# EAGLE board Arm-IMU (EAGLE 7.2.0)
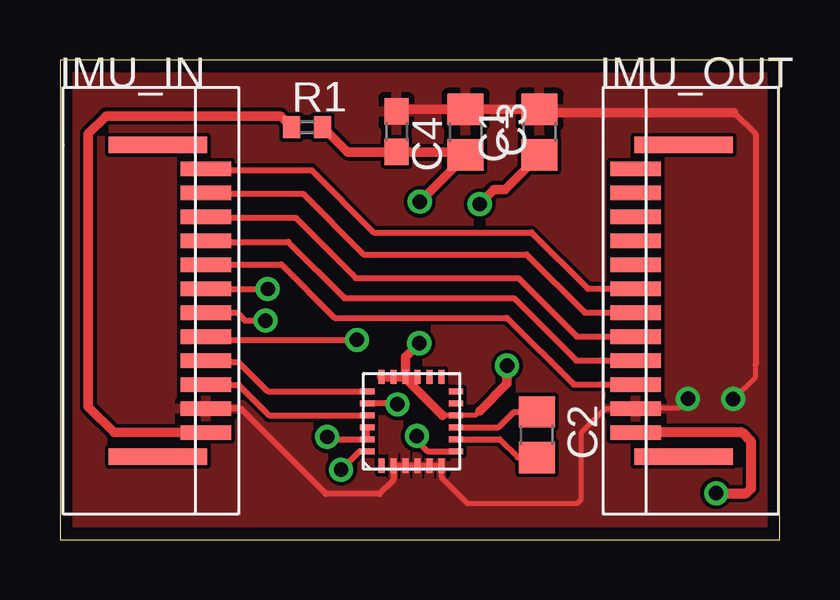
[diagram p0: board, top side]
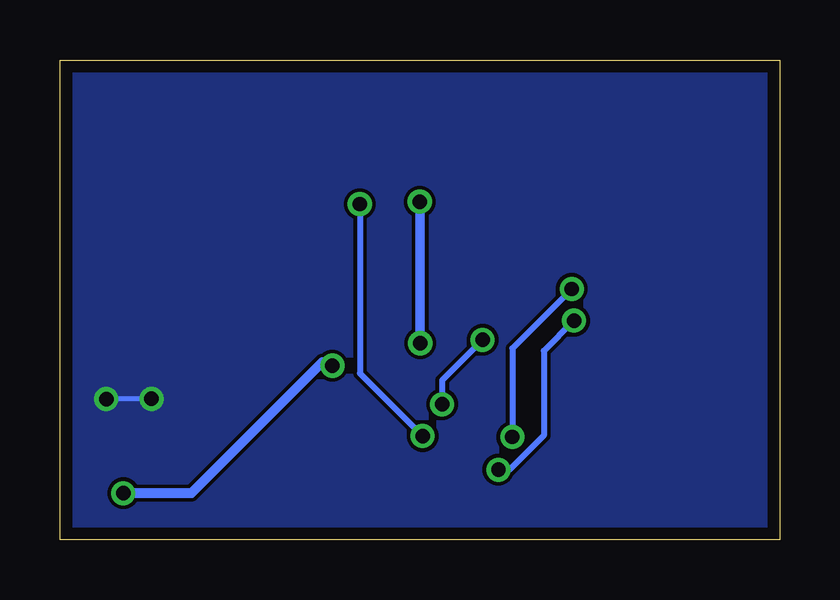
[diagram p1: board, bottom side, seen from below]

Size 30 x 20 mm. Coordinates in mm from the lower left corner, seen from the top.
Outline: 0,0 30,0 30,20 0,20 0,0
Copper layers (1*16): Top 0.035mm / dielectric 1.5mm / Bottom 0.035mm
Design rules "default *": minimum track width 6mil, minimum drill 12mil, track to track 6mil, track to pad 6mil, pad to pad 6mil, via to via 6mil, smd to smd 6mil, copper to edge 20mil, drill to drill 12mil, minimum pad ring 10mil, minimum via ring 8mil, stop-mask expansion 4mil, vias tented up to drill 0mil, thermal gap 10mil

## Footprints (pad centres in the part's own frame; a part is rotated, then mirrored left to right if it is on the bottom)
C0805 = smd 1.3 x 1.5: 1 -0.95,0; 2 0.95,0
C0603 = smd 1.1 x 1: 1 -0.85,0; 2 0.85,0
IN = smd 2.1 x 0.6: 1_VCC 2.3,-5.5; 2_GND 2.3,-4.5; 3_SCL 2.3,-3.5; 4_CS_G 2.3,-2.5; 5_CS_XM 2.3,-1.5; 6_SDI 2.3,-0.5; 7_SDO 2.3,0.5; 8_SCL_NEXT 2.3,1.5; 9_CS_G_NEXT 2.3,2.5; 10_CS_XM_NEXT 2.3,3.5; 11_SDI_NEXT 2.3,4.5; 12_SDO_NEXT 2.3,5.5 | smd 4.1 x 0.7: 13_NC 0.3,6.5; 14_NC 0.3,-6.5
OUT = smd 2.1 x 0.6: 1_VCC -2.3,-5.5; 2_GND -2.3,-4.5; 3_SCL -2.3,-3.5; 4_CS_G -2.3,-2.5; 5_CS_XM -2.3,-1.5; 6_SDI -2.3,-0.5; 7_SDO -2.3,0.5; 8_SCL_NEXT -2.3,1.5; 9_CS_G_NEXT -2.3,2.5; 10_CS_XM_NEXT -2.3,3.5; 11_SDI_NEXT -2.3,4.5; 12_SDO_NEXT -2.3,5.5 | smd 4.1 x 0.7: 13_NC -0.3,6.5; 14_NC -0.3,-6.5
R0402 = smd 0.7 x 0.9: 1 -0.65,0; 2 0.65,0
LGA-24 = smd 0.25 x 0.6: 1_RES -1.25,-1.85; 2_RES -0.75,-1.85; 3_RES -0.25,-1.85; 4_RES 0.25,-1.85; 5_GND 0.75,-1.85; 6_GND 1.25,-1.85; 13_INT1_XM 1.25,1.85; 14_INT2_XM 0.75,1.85; 15_VDD 0.25,1.85; 16_VDD -0.25,1.85; 17_VDD -0.75,1.85; 18_VDD_IO -1.25,1.85 | smd 0.6 x 0.25: 7_C1_XM 1.85,-1.25; 8_SETC_XM 1.85,-0.75; 9_SETP_XM 1.85,-0.25; 10_DEN_G 1.85,0.25; 11_INT_G 1.85,0.75; 12_DRDY_G 1.85,1.25; 19_CS_G -1.85,1.25; 20_CS_XM -1.85,0.75; 21_SCL/SPC -1.85,0.25; 22_SDO_G/SA0_G -1.85,-0.25; 23_SDO_XM/SA0_XM -1.85,-0.75; 24_SDA -1.85,-1.25

## Placement (x,y rotation side)
C1  4.7u  [C0805]  19.99,16.99 90 top
C2  0.22u  [C0805]  19.88,4.37 270 top
C3  10u  [C0805]  16.91,16.99 270 top
C4  100n  [C0603]  14.03,17.01 270 top
IMU_IN  IMU-BUCHSE-IN  [IN]  3.79,9.96 0 top
IMU_OUT  IMU-BUCHSE-OUT  [OUT]  26.3,9.96 0 top
R1  0  [R0402]  10.3,17.2 0 top
U$1  LSM9DS0-LGA-24  [LGA-24]  14.66,4.93 0 top

## Library data of the parts
C1-C3 R1 = rclGlove
C4 = resistor
IMU_IN IMU_OUT = IMU-Buchse
U$1 = ST LSM9DS0TR

## Nets
CS_G: IMU_IN.4_CS_G U$1.19_CS_G
CS_G_NEXT: IMU_IN.9_CS_G_NEXT IMU_OUT.4_CS_G
CS_XM: IMU_IN.5_CS_XM U$1.20_CS_XM
CS_XM_NEXT: IMU_IN.10_CS_XM_NEXT IMU_OUT.5_CS_XM
GND: C1.2 C3.1 C4.1 IMU_IN.2_GND IMU_OUT.2_GND U$1.2_RES U$1.3_RES U$1.4_RES U$1.5_GND U$1.6_GND
N$1: C1.1 U$1.7_C1_XM
N$2: C2.1 U$1.9_SETP_XM
N$3: C2.2 U$1.8_SETC_XM
N$4: IMU_IN.1_VCC R1.1
SCL: IMU_IN.3_SCL U$1.21_SCL/SPC
SCL_NEXT: IMU_IN.8_SCL_NEXT IMU_OUT.3_SCL
SDI: IMU_IN.6_SDI U$1.24_SDA
SDI_NEXT: IMU_IN.11_SDI_NEXT IMU_OUT.6_SDI
SDO: IMU_IN.7_SDO U$1.22_SDO_G/SA0_G U$1.23_SDO_XM/SA0_XM
SDO_NEXT: IMU_IN.12_SDO_NEXT IMU_OUT.7_SDO
VCC: C3.2 C4.2 IMU_OUT.1_VCC R1.2 U$1.10_DEN_G U$1.15_VDD U$1.16_VDD U$1.17_VDD U$1.18_VDD_IO

## Tracks (layer width: path | path; a pad name or v marks a point on that pad's centre or on a via)
CS_G
  Top 0.25: IMU_IN.4_CS_G 6.14,7.41 7.43,7.41 8.66,6.18 U$1.19_CS_G
CS_G_NEXT
  Top 0.25: IMU_IN.9_CS_G_NEXT 6.14,12.41 9.52,12.41 11.86,10.07 18.92,10.07 21.53,7.46 IMU_OUT.4_CS_G
CS_XM  (via drill 0.6)
  Top 0.25: IMU_IN.5_CS_XM 6.22,8.33 v12.38,8.33 | v14.07,5.64 13.86,5.43 13.61,5.68 U$1.20_CS_XM
  Bottom 0.25: v12.38,8.33 14.07,6.64 v14.07,5.64
CS_XM_NEXT
  Top 0.25: IMU_IN.10_CS_XM_NEXT 6.13,13.42 9.82,13.42 12.34,10.9 19.11,10.9 21.55,8.46 IMU_OUT.5_CS_XM
GND  (via drill 0.6)
  Top 0.2: U$1.6_GND 15.91,2.59 17,1.5 21.56,1.5 21.72,1.66 21.72,4.44 22.72,5.44 23.98,5.44 IMU_OUT.2_GND 24.03,5.49 25.8,5.49 v26.18,5.87 | v28.07,5.86 29,6.79 29,7.3
  Top 0.25: 28.1,17.8 29,16.9 29,7.3 | U$1.6_GND U$1.5_GND U$1.4_RES U$1.3_RES U$1.2_RES 13.91,2.5 13.31,1.9 11.09,1.9 7.53,5.46 IMU_IN.2_GND
  Top 0.4: C4.1 14.11,17.94 C3.1 C1.2 20.13,17.8 28.1,17.8
  Bottom 0.2: v26.18,5.87 v26.19,5.86 v28.07,5.86
  pour Bottom: 0,20 30,20 30,0 0,0
  pour Top: 0,20 30,20 30,0 0,0
N$1  (via drill 0.6)
  Top 0.25: v14.88,4.32 14.88,4.12 15.32,3.68 U$1.7_C1_XM
  Top 0.4: C1.1 18.55,14.6 18.1,14.6 v17.5,14 v17.5,13.99
  Bottom 0.25: v17.5,13.99 v17.49,13.98 17.49,6.93 v14.88,4.32
N$2
  Top 0.25: U$1.9_SETP_XM 18.29,4.68 18.93,5.32 C2.1
N$3
  Top 0.25: U$1.8_SETC_XM 18.33,4.18 19.09,3.42 C2.2
N$4
  Top 0.4: R1.1 9.19,17.66 1.92,17.66 1.18,16.92 1.18,5.54 2.26,4.46 IMU_IN.1_VCC
SCL
  Top 0.25: IMU_IN.3_SCL 7.45,6.45 8.72,5.18 U$1.21_SCL/SPC
SCL_NEXT
  Top 0.25: IMU_IN.8_SCL_NEXT 9.23,11.47 11.45,9.25 18.63,9.25 21.42,6.46 IMU_OUT.3_SCL
SDI  (via drill 0.6)
  Top 0.25: IMU_IN.6_SDI 7.39,9.46 7.72,9.13 v8.57,9.13 | v11.72,2.91 12.49,3.68 U$1.24_SDA
  Bottom 0.25: v8.57,9.13 9.83,7.87 9.83,4.34 11.26,2.91 v11.72,2.91
SDI_NEXT
  Top 0.25: IMU_IN.11_SDI_NEXT 6.13,14.42 10.13,14.42 12.66,11.89 19.45,11.89 21.88,9.46 IMU_OUT.6_SDI
SDO  (via drill 0.6)
  Top 0.25: IMU_IN.7_SDO v8.66,10.45 | v11.14,4.28 11.24,4.18 U$1.23_SDO_XM/SA0_XM U$1.22_SDO_G/SA0_G
  Bottom 0.25: v8.66,10.45 11.14,7.97 v11.14,4.28
SDO_NEXT
  Top 0.25: 6.15,15.4 10.49,15.4 13.08,12.81 19.66,12.81 22.01,10.46 IMU_OUT.7_SDO
  Top 0.4: IMU_IN.12_SDO_NEXT 6.15,15.4
VCC  (via drill 0.6)
  Top 0.2: 17.5,5.37 17.5,5.36 17.33,5.19 U$1.10_DEN_G 15.94,5.18
  Top 0.25: U$1.16_VDD U$1.15_VDD
  Top 0.4: v14.98,8.19 14.41,7.62 U$1.16_VDD | U$1.16_VDD U$1.17_VDD U$1.18_VDD_IO | v15,14.09 16.91,16 C3.2 16.91,16.16 C4.2 11.99,16.16 R1.2 | 17.5,5.37 18.64,6.51 v18.64,7.25 | 15.94,5.18 14.41,6.71 U$1.16_VDD
  Top 0.406: 18.64,6.75 v18.64,7.25 | v27.36,1.93 28.62,1.93 28.82,2.13 28.82,4.08 28.44,4.46 IMU_OUT.1_VCC
  Bottom 0.4: v15,14.09 14.98,14.07 v14.98,8.19
  Bottom 0.406: v18.64,7.25 18.78,7.39 19.07,7.39 24.53,1.93 v27.36,1.93